# Altium PCB nRF52_UWB_MPU9255_Second_JLC.pcbdoc
Units mil, origin at the board's own origin, x right, y up, seen from the top; angles counter-clockwise.
Board outline 3070.43 x 2470.42 mil, 2 copper layers (Top Layer, Bottom Layer); 31 components, 29 nets, 182 pads, 66 vias.
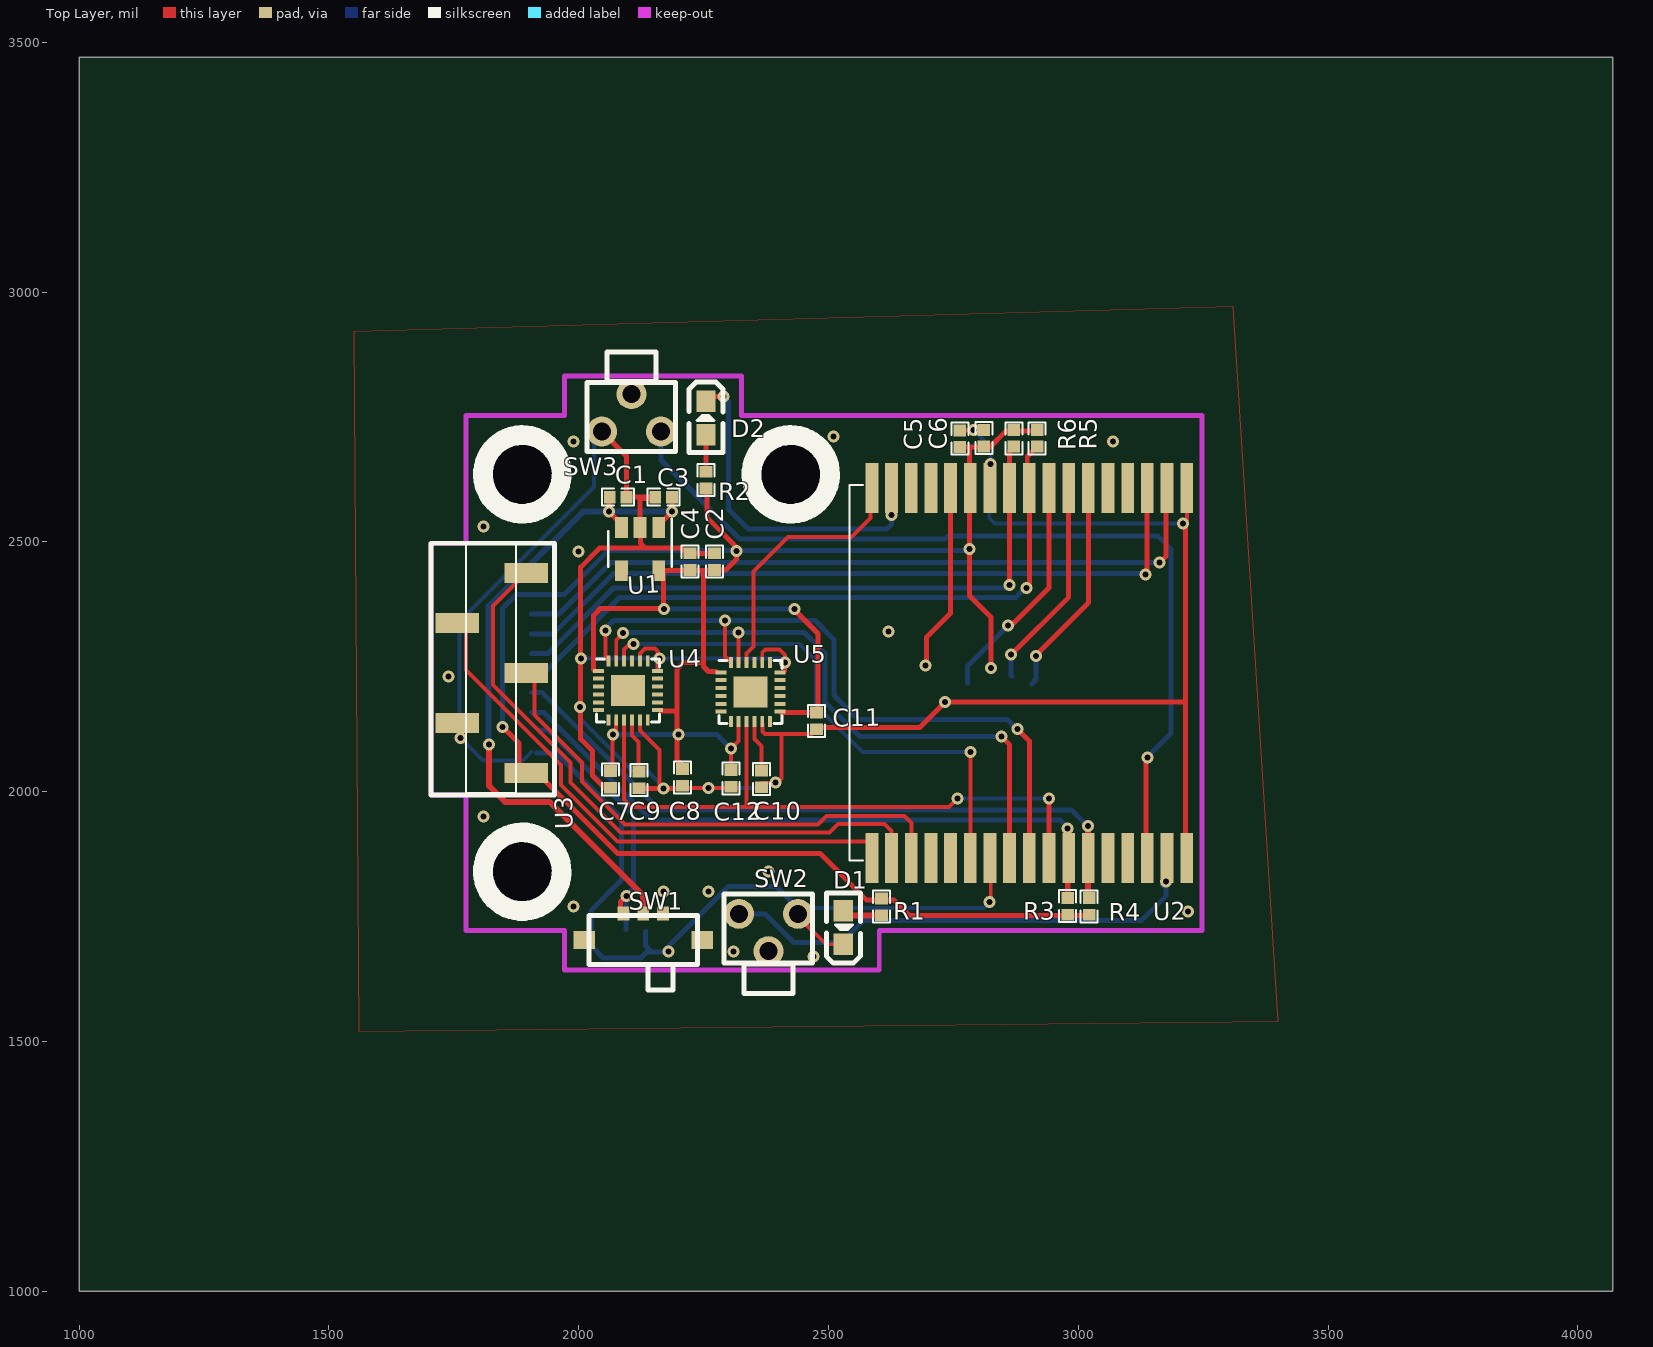
[diagram p0: Top Layer view]
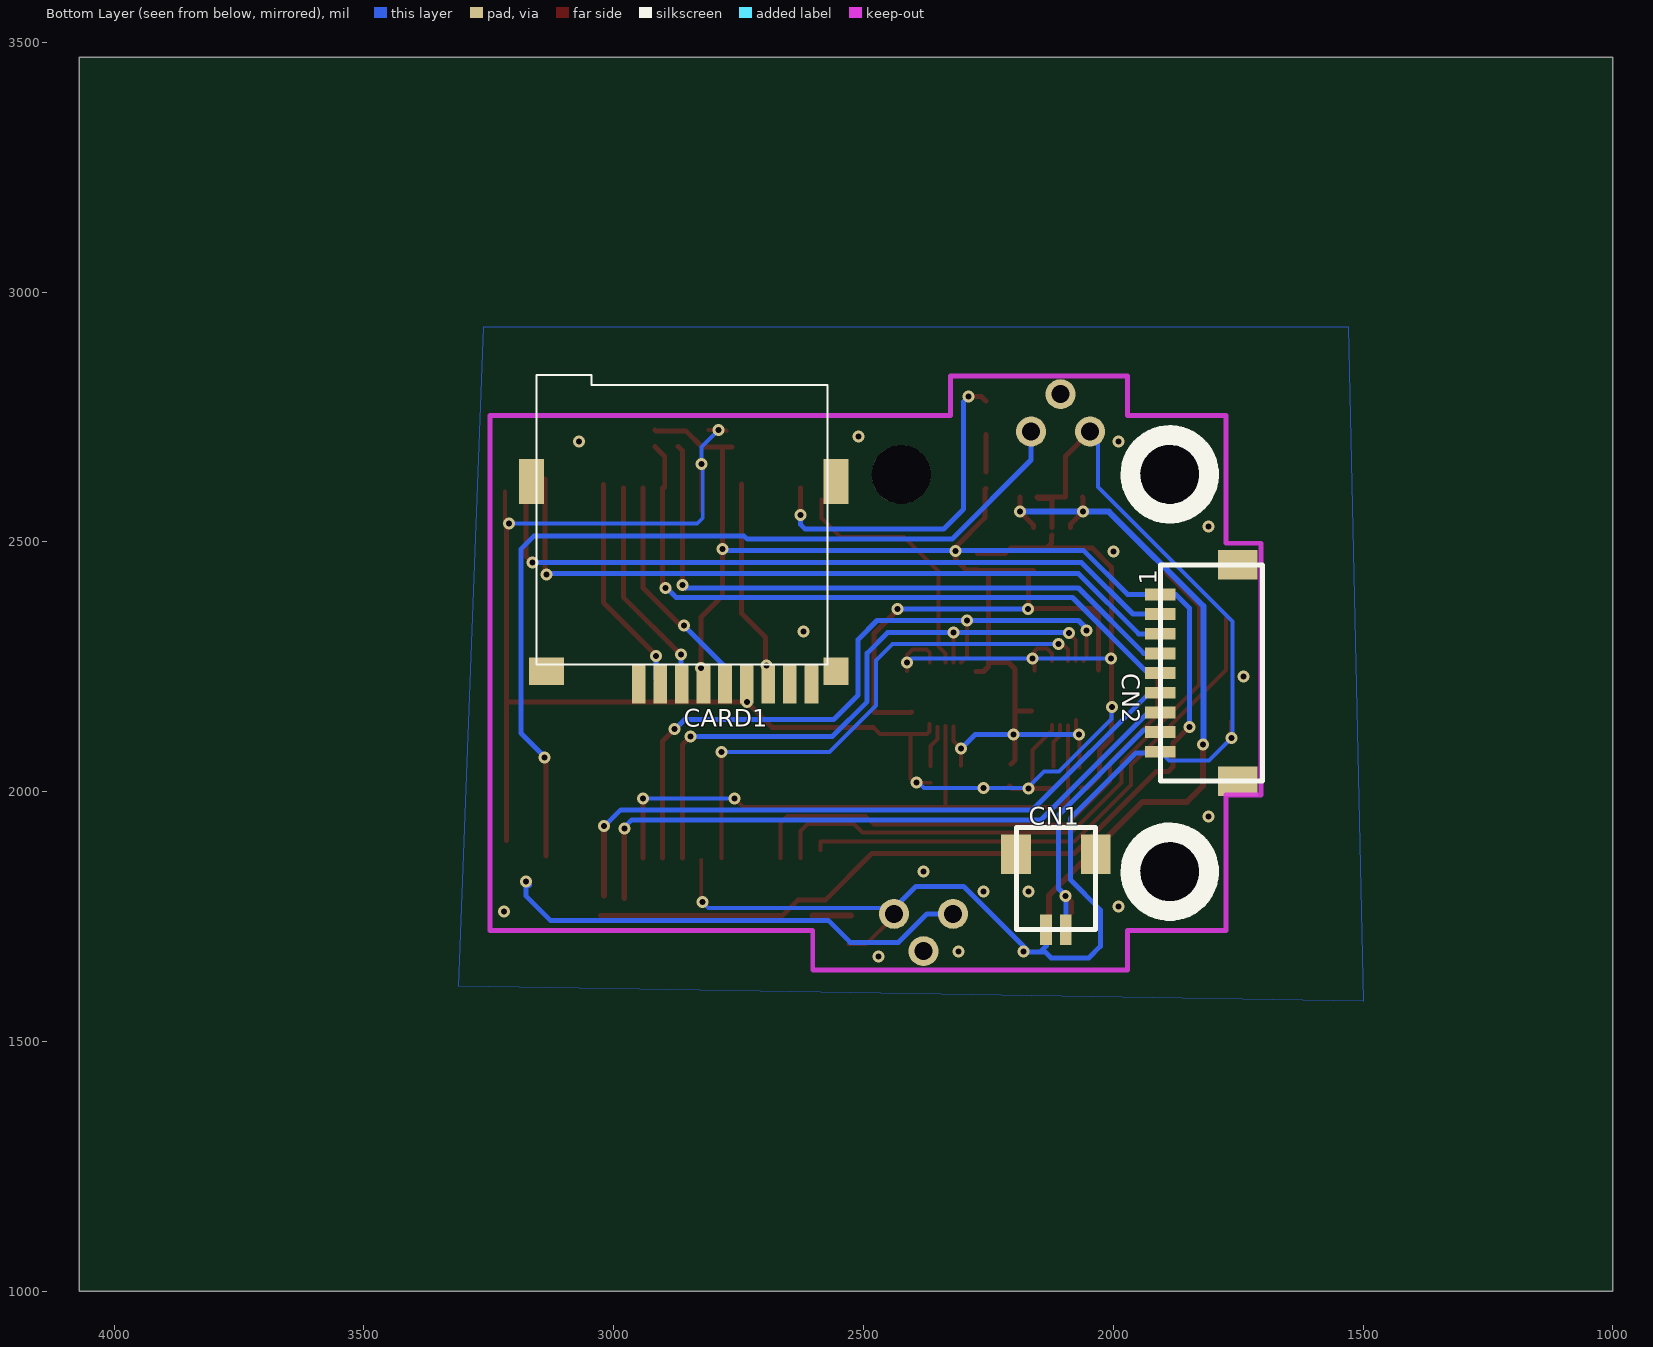
[diagram p1: Bottom Layer view, seen from below]

## Layer stack, top to bottom
Top Layer: signal copper (thickness not stored)
Dielectric: dielectric 12.6, FR-4, Dk 4.8
Bottom Layer: signal copper (thickness not stored)

## Board outline
4070.43,1000 1000,1000 1000,3470.42 4070.43,3470.42

## Components (designator, comment, footprint, x,y, rotation, side; value= is the part's Value field where it differs from the comment)
C1 "10uF" 0402 2079,2589.42 r180 top
C2 "10uF" 0402 2272,2460.42 r270 top
C3 "100nF" 0402 2170,2589.42 r0 top
C4 "100nF" 0402 2223,2460.42 r270 top
C5 "10uF" 0402 2763,2706.42 r270 top
C6 "100nF" 0402 2811,2707.42 r270 top
C7 "10nF" 0402 2064,2024.42 r90 top
C8 "100nF" 0402 2208,2028.42 r90 top
C9 "100nF" 0402 2121,2023.42 r270 top
C10 "100nF" 0402 2366,2025.42 r270 top
C11 "100nF" 0402 2476,2141.42 r90 top
C12 "10nF" 0402 2305,2026.42 r90 top
CARD1 "HYC77-TF09-200" TF-015 2860,2418.06 r180 bottom
CN1 "A1002WV-S-2P" A1002WR-S-2P_LEO 2114.93,1799.54 r180 bottom
CN2 "A1002WR-S-9P" A1002WR-S-9P_LEO 1830.09,2237.35 r270 bottom
D1 "YELLOW" LED-0603 2530,1728.06 r90 top
D2 "RED" LED-0603 2255,2748.06 r270 top
R1 "1K" 0402 2606,1769.42 r270 top
R2 "200" 0402 2255,2623.42 r270 top
R3 "10K" 0402 2979,1770.42 r270 top
R4 "10K" 0402 3021.96,1770.18 r270 top
R5 "10K" 0402 2918,2707.42 r90 top
R6 "10K" 0402 2871,2707.42 r90 top
SW1 "SSAJ120100" SW-SMD-5.5X2.5 2129.33,1729.44 r0 top
SW2 "KAN4562-0501C" KAN4562-0501C 2380,1718.01 r0 top
SW3 "KAN4562-0501C" KAN4562-0501C 2105.7,2758.01 r180 top
U1 "SPX3819M5-L-3-3/TR" SOT-23-5 2123,2485.42 r270 top
U2 "DWM1001" DWM1001 3054.53,2237.31 r270 top
U3 "GPS_Header" GPS_HEADER_SMT 1775,1721.56 r90 top
U4 "MPU-9250" QFN-24-1EP_3X3MM_PITCH0.4MM 2099,2202.42 r0 top
U5 "MPU-9250" QFN-24-1EP_3X3MM_PITCH0.4MM 2344,2199.42 r0 top

## Footprints (in the part's own frame and the unit in brackets; to place one, negate y for a bottom-side part, rotate by r counter-clockwise, add the part's x,y. Pads: shape width x height; smd on the part's side, far side on the other; paste and mask are expansions set on the pad)
0402 [mm]
  rect 0.6x0.65 smd: 1(-0.424,0) 2(0.424,0)
  silkscreen extent -0.82,-0.43 0.81,0.43
A1002WR-S-2P_LEO [mm]
  rect 0.6x1.55 smd: 1(-0.502,-1.925) 2(0.499,-1.925)
  rect 1.5x2 smd: 3(-2.033,1.904) 4(2.031,1.904)
  silkscreen extent -2,-1.92 2,3.27
A1002WR-S-9P_LEO [mm]
  rect 0.6x1.55 smd: 1(-4.001,-1.923) 2(-3,-1.923) 3(-1.997,-1.926) 4(-1.001,-1.923) 5(0,-1.923) 6(1.001,-1.923) 7(1.999,-1.923) 8(3.001,-1.923) 9(4,-1.923)
  rect 1.5x2 smd: 10(-5.499,2) 11(5.5,2)
  silkscreen extent -5.5,-1.92 5.5,3.28
DWM1001 [mm]
  rect 2.54x0.65 smd: 1(-9.404,4.129) 2(-9.404,3.129) 3(-9.404,2.128) 4(-9.404,1.13) 5(-9.404,0.129) 6(-9.404,-0.872) 7(-9.404,-1.87) 8(-9.404,-2.871) 9(-9.404,-3.872) 10(-9.404,-4.871) 11(-9.404,-5.871) 12(-9.404,-6.871) 13(-9.404,-7.872) 14(-9.404,-8.87) 15(-9.404,-9.871) 16(-9.404,-10.872) 17(-9.404,-11.87) 18(9.404,-11.87) 19(9.404,-10.872) 20(9.404,-9.871) 21(9.404,-8.87) 22(9.404,-7.872) 23(9.404,-6.871) 24(9.404,-5.871) 25(9.404,-4.871) 26(9.404,-3.872) 27(9.404,-2.871) 28(9.404,-1.87) 29(9.404,-0.872) 30(9.404,0.129) 31(9.404,1.13) 32(9.404,2.128) 33(9.404,3.129) 34(9.404,4.129)
  silkscreen extent -9.56,-13.02 9.54,-12.32
GPS_HEADER_SMT [mm]
  rect 1.02x2.2 smd: 1(8.02,-3.051) 2(10.56,0.45) 3(13.1,-3.051) 4(15.64,0.45) 5(18.18,-3.051)
  round 3 hole 3 slot 3 at 90 deg unplated: ""(3,-2.85) ""(23.2,-2.85)
  silkscreen extent 1,-4.85 25.2,1.8
KAN4562-0501C [mil]
  round 60 hole 36: 0(0,-37.4) 1(-59.05,37.4) 2(59.06,37.4)
  silkscreen extent -89,-122 89,77
LED-0603 [mil]
  rect 43x39 smd: 1(33.5,0) 2(-33.5,0)
  silkscreen extent -72,-34 70,34
QFN-24-1EP_3X3MM_PITCH0.4MM [mil]
  rect 21.65x7.87 smd: 1(-59.05,39.35) 2(-59.05,23.65) 3(-59.05,7.85) 4(-59.05,-7.85) 5(-59.05,-23.65) 6(-59.05,-39.35) 13(59.05,-39.35) 14(59.05,-23.65) 15(59.05,-7.85) 16(59.05,7.85) 17(59.05,23.65) 18(59.05,39.35)
  rect 7.87x21.65 smd: 7(-39.35,-59.05) 8(-23.65,-59.05) 9(-7.85,-59.05) 10(7.85,-59.05) 11(23.65,-59.05) 12(39.35,-59.05) 19(39.35,59.05) 20(23.65,59.05) 21(7.85,59.05) 22(-7.85,59.05) 23(-23.65,59.05) 24(-39.35,59.05)
  rect 34.45x31.5 smd: 25(-17.1,-15.75) 25(-17.1,15.75) 25(17.15,-15.75) 25(17.15,15.75)
  silkscreen extent -63,-63 63,63
SOT-23-5 [mm]
  rect 1.06x0.65 smd: 1(-1.1,0.95) 2(-1.1,0) 3(-1.1,-0.95) 4(1.1,-0.95) 5(1.1,0.95)
  silkscreen extent -1.55,-1.61 0.9,1.61
SW-SMD-5.5X2.5 [mm]
  rect 0.6x0.7 smd: 1(-0.999,0.675) 2(1,0.675) C(-0.001,0.675)
  rect 1.1x0.9 smd: 4(-2.999,-0.675) 5(3,-0.675)
  silkscreen extent -2.75,-3.22 2.75,0.58
TF-015 [mil]
  rect 27.56x78.74 smd: 1(-90.2,-202.55) 2(-46.95,-202.5) 3(-3.75,-202.55) 4(39.5,-202.55) 5(82.8,-202.55) 6(126,-202.55) 7(169.2,-202.55) 8(212.4,-202.55) 9(255.9,-202.55)
  rect 50x55 smd: 10(305,-177.4)
  rect 50x90 smd: 11(305,202.6) 12(-305,202.6)
  rect 70x55 smd: 13(-275,-177.4)
  silkscreen extent -295,-163 288,416

## Free pads (board coordinates)
  round 118.11 hole 118.1 slot 118.11 at 0 deg unplated: ""(2424.61,2634.95)

## Via types
v1: diameter 24.02, hole 12.01, Top Layer to Bottom Layer, 66 vias

## Nets (pads, with @x,y where several pads share a name; then routed paths per layer and width w, separated by ;. In a path a pad name is that pad's centre, name@x,y a point inside that pad or via, vN(x,y) a via of type N, cw(c..) or ccw(c..) an arc to the next point about the centre after c; other vN are vias at no path point)
BUTTON_RST: SW2.1 U2.33 | length 953.7
  Bottom Layer w10: SW2.1@2320.95,1755.46 2372.96,1755.46 2430,1698.42 2527,1698.42 2571,1742.42 3127,1742.42 3176,1791.42 v1@3176,1819.42
  Bottom Layer w11.81: v1@3170,1813.42 v1@3176,1819.42
  other v1: 3175.65,1820.42
BUTTON_SDCARD: SW3.1 U2.32 | length 1794.7
  Top Layer w10: U2.32@3136,1871.42 v1@3136,2074.42
  Bottom Layer w10: SW3.1@2164.76,2720.66 2164.76,2663.66 2323.2,2505.22 2732.8,2505.22 2739,2511.42 3160,2511.42 3186,2485.42 3186,2117.42 v1@3139,2070.42
  other v1: 3138.65,2068.42
CHARGE_VC: CN1.2 CN2.8 SW1.1 | length 530.6
  Top Layer w10: SW1.1@2084,1758.42 2084,1779.42 v1@2096,1791.42
  Bottom Layer w10: CN2.8@1923,2123.42 1939,2123.42 2110,1952.42 2110,1806.12 2095.3,1791.42 CN1.2
  other v1: 2095.65,1791.42
D2_1: D2.1 R2.1 | length 74.4
  Top Layer w10: R2.1 D2.1
FOOT_2: CN2.4 R6.1 U2.10 | length 1293.5
  Top Layer w10: v1@2862.75,2413.42 2862.75,2682.47 R6.1
  Bottom Layer w10: CN2.4 1939.34,2276.76 2070,2407.42 2856,2407.42 v1(2862,2413.42)
FOOT_5: CN2.5 R5.1 U2.9 | length 1349.4
  Top Layer w10: U2.9@2898,2608.42 2898,2670.72 R5.1 ; v1@2902.1,2407.42 U2.9
  Bottom Layer w10: CN2.5 1930.94,2237.36 2082,2388.42 2875,2388.42 v1@2894,2407.42
  other v1: 2897,2407.42
FOOT_6: CN2.6 R4.1 U2.29 | length 1365.8
  Top Layer w11.81: v1@3019,1932.42 3020,1931.42 R4.1@3020,1792.42
  Bottom Layer w10: CN2.6 1927.46,2197.96 2162,1963.42 2986,1963.42 v1@3020,1929.42
  other v1: 3019.65,1931.42
FOOT_7: CN2.7 R3.1 U2.28 | length 1310.7
  Top Layer w11.81: R3.1 v1@2979,1926.42
  Bottom Layer w10: CN2.7 1929.76,2158.66 2145,1943.42 2964,1943.42 v1@2981,1926.42
  other v1: 2978.65,1926.42
GND: C1.1 C2.1 C3.1 C4.1 C5.1 C6.1 C7.1 C8.1 C9.2 C10.2 C11.1 C12.1 CARD1.6 CN1.1 CN2.9 D1.2 SW2.2 SW3.2 U1.2 U2.1 U2.11 U2.24 U2.34 U3.2 U4.11 U4.18 U4.20 U5.11 U5.18 U5.20 | length 7541.8
  Top Layer w7.87: v1@1764,2107.42 1765,2108.42 U3.2@1765,2140.42 ; U4.20 2122.65,2276.07 2133,2286.42 2153,2286.42 2158,2281.42 U4.18@2158,2242.42 ; U4.11@2123,2133.42 2123,2122.42 2162,2083.42 v1@2162,2006.72 ; C8.1@2212,2007.42 C12.1@2315,2007.42 ; C10.2@2366,2017.72 2397.3,2017.72 2406,2026.42 2406,2115.42 ; U5.20 2367.65,2278.07 2374,2284.42 2402,2284.42 2413,2273.42 U5.18@2413,2241.42 ; U5.11@2367.9,2135.7 2367.9,2120.52 2373,2115.42 2467,2115.42 C11.1@2480,2128.42 ; SW2.2@2444,1745.42 2494.86,1694.56 D1.2 ; C5.1@2774,2721.42 2776.7,2724.12 C6.1 ; v1@2822,1777.42 2825,1780.42 U2.24@2825,1863.42 ; U2.11@2823,2657.42 2825,2655.42 U2.11@2825,2561.42 ; v1@3210,2535.42 3218,2543.42 U2.1@3218,2600.42
  Top Layer w10: SW3.2@2046.65,2720.66 2095.7,2671.61 C1.1 C3.1 2150.3,2586.42 2122,2586.42 2123,2585.42 U1.2 ; C7.1 2051.7,2007.72 2028,2031.42 2028,2081.42 2004,2105.42 2004,2449.42 2042,2487.42 2206,2487.42 2216.3,2477.12 C2.1 ; C9.2 2203,2006.72 C8.1 ; U1.2@2123,2513.42 2124,2512.42 2124,2497.42 2134,2487.42 ; C11.1@2480,2128.42 2683,2128.42 2734,2179.42 3215,2179.42 ; v1(3209.65,2536.42) 3215,2531.07 U2.34@3215,1902.42
  Bottom Layer w7.87: CN2.9 1888.36,2062.42 1809,2062.42 1762,2109.42 1762,2340.42 2031,2609.42 2031,2705.01 SW3.2@2046.65,2720.66 ; v1@2003,2169.42 2003.77,2168.65 2003.77,2145.42 2108.77,2040.42 2139,2040.42 2172,2007.42 2379,2007.42 v1@2391,2019.42 ; v1@2005,2266.42 2404.65,2266.42 v1(2412.65,2258.42) ; SW2.2@2439.06,1755.46 2451.02,1767.42 2811,1767.42 v1@2823,1779.42 ; v1(2790.65,2724.12) 2824.65,2690.12 v1(2824.65,2655.42) 2822,2652.77 2822,2547.42 2833,2536.42 v1(3209.65,2536.42)
  Bottom Layer w10: CN2.9@1916,2077.42 1955,2077.42 2086,1946.42 2086,1823.42 2026,1763.42 2026,1690.42 2049,1667.42 2125,1667.42 2137,1679.42 2169,1679.42 2300,1810.42 2395,1810.42 SW2.2@2440,1765.42 ; CN1.1@2134,1720.42 2134,1691.42 2146,1679.42 ; SW2.2@2431,1736.42 SW2.2@2438,1743.42
  other v1: 2470,1670.42 2180,1680.42 2310,1680.42 3220,1760.42 1990,1770.42 2822.65,1779.42 2170,1800.42 2260,1800.42 2380,1840.42 1810,1950.42 2170,2006.72 2260,2007.42 2394.09,2018.51 1763.65,2107.42 2002.65,2169.42 2733.65,2179.42 1740,2230.42 2004.65,2266.42 2161.73,2266.24 2620,2320.42 2000,2480.42 1810,2530.42 1990,2700.42 3070,2700.42 2510,2710.42
GPS_1PPS: U2.19 U3.5 | length 1261.3
  Top Layer w7.87: U3.5 1829,2371.21 1829,2213.42 1984,2058.42 1984,2018.42 2084,1918.42 2502,1918.42 2519,1935.42 2612,1935.42 2626.5,1920.92 U2.19
GPS_UART_RX: U2.18 U3.4 | length 1097.5
  Top Layer w7.87: U3.4@1775,2347.42 1775,2243.42 1965,2053.42 1965,2013.42 2078,1900.42 2586,1900.42 U2.18@2586,1883.42
GPS_UART_TX: U2.20 U3.3 | length 1042.1
  Top Layer w7.87: U3.3@1912,2245.42 1912,2153.42 2007,2058.42 2007,2020.42 2093,1934.42 2479,1934.42 2496,1951.42 2652,1951.42 2665.9,1937.52 U2.20
LED_R: D2.2 U2.16 | length 687.6
  Top Layer w10: D2.2 2263.86,2790.42 v1(2290,2790.42) ; v1(2626,2553.42) 2626,2607.06 U2.16
  Bottom Layer w10: v1(2290,2790.42) 2300,2780.42 2300,2777.42 2300,2565.42 2340.12,2525.3 2616.88,2525.3 2626,2534.42 v1(2626,2553.42)
MPU92_CLK: U2.25 U4.23 U5.23 | length 1269.6
  Top Layer w7.87: U4.23 2075.35,2303.77 v1(2089,2317.42) ; U5.23 v1@2320.35,2318.42
  Top Layer w10: v1(2846,2110.42) 2862.75,2093.67 U2.25
  Bottom Layer w10: v1@2091,2318.42 2451.75,2318.42 2493,2277.17 2493,2179.96 2561.77,2111.19 ; 2561.77,2110.42 v1(2846,2110.42)
  other v1: 2320,2318.42
MPU92_MISO: U2.27 U4.9 U5.9 | length 1293.1
  Top Layer w7.87: 2091,2132.42 2091,1984.42 2106,1969.42 2741,1969.42 v1(2758,1986.42) ; 2336,1969.42 U5.9@2336,2131.42
  Top Layer w10: U2.27 v1(2941.5,1986.42)
  Bottom Layer w7.87: v1(2758,1986.42) v1(2941.5,1986.42)
MPU92_MOSI: U2.26 U4.24 U5.24 | length 1416.8
  Top Layer w7.87: v1(2054,2322.42) 2054,2267.12 U4.24 ; v1@2293,2350.42 2293,2270.07 U5.24 U5.24
  Top Layer w10: v1(2878,2125.42) 2902.1,2101.32 U2.26
  Bottom Layer w10: v1@2052,2324.42 2070,2342.42 2473,2342.42 2511,2304.42 2511,2193.42 2560,2144.42 2858,2144.42 2877,2125.42 v1(2878,2125.42)
  other v1: 2293,2342.42
MPU92_NCS: U2.23 U4.22 | length 1076.8
  Top Layer w7.87: U4.22 2091.15,2284.11 2102.46,2295.42 v1(2110,2295.42) ; U2.23 v1(2784,2079.42)
  Bottom Layer w7.87: v1@2108,2295.42 2442.22,2295.42 2475,2262.64 2475,2172.51 2568.09,2079.42 v1(2784,2079.42)
MPU92B_NCS: U2.17 U5.22 | length 503
  Top Layer w7.87: U5.22 2336.15,2276.35 2350,2290.2 2350,2440.42 2419,2509.42 2546,2509.42 2584,2547.42 U2.17@2584,2584.42
R1_2: D1.1 R1.2 | length 77
  Top Layer w11.81: D1.1@2525,1752.42 R1.2@2602,1752.42
SDCARD_CLK: CARD1.5 U2.8 | length 459.6
  Top Layer w10: v1@2863,2329.42 2941.5,2407.92 U2.8
  Bottom Layer w10: CARD1.5@2778,2217.42 2778,2250.42 v1@2860,2332.42
  other v1: 2859.65,2332.42
SDCARD_MISO: CARD1.7 U2.13 | length 383.1
  Top Layer w10: v1@2693,2253.42 2696,2256.42 2696,2308.42 2744,2356.42 U2.13@2744,2615.42
  other v1: 2694.65,2252.42
SDCARD_MOSI: CARD1.3 U2.7 | length 424.3
  Top Layer w10: v1@2866,2274.42 2980.9,2389.32 U2.7
  Bottom Layer w10: v1(2865.65,2274.42) 2865.65,2232.77 CARD1.3@2867,2231.42
SDCARD_NCS: CARD1.2 U2.6 | length 446.8
  Top Layer w10: v1@2914,2271.42 3021,2378.42 U2.6@3021,2614.42
  Bottom Layer w10: CARD1.2 2915.65,2224.26 v1(2915.65,2271.42)
SWD_CLK: CN2.2 U2.2 | length 1469.2
  Top Layer w10: v1(3163,2458.42) 3176,2471.42 U2.2@3176,2622.42
  Bottom Layer w10: CN2.2 1960.76,2355.46 2063.72,2458.42 v1(3163,2458.42)
SWD_DIO: CN2.3 U2.3 | length 1470
  Top Layer w10: v1@3138,2434.42 U2.3@3138,2625.42
  Bottom Layer w10: CN2.3 1949.54,2315.96 2070,2436.42 v1@3135,2436.42
  other v1: 3135,2434.42
U4_10: C9.1 U4.10 | length 88.7
  Top Layer w7.87: U4.10@2106.9,2133.7 2106.9,2112.52 2120,2099.42 C9.1@2120,2050.42
U5_10: C10.1 U5.10 | length 84.4
  Top Layer w7.87: U5.10@2351.9,2129.7 2351.9,2105.22 2366,2091.12 C10.1@2366,2051.12
VCC3.3: C2.2 C4.2 C5.2 C6.2 C7.2 C8.2 C11.2 C12.2 CARD1.4 CN2.1 R1.1 R2.2 R3.2 R4.2 R5.2 R6.2 U1.5 U2.12 U3.1 U4.1 U4.8 U4.13 U5.1 U5.8 U5.13 | length 5393.1
  Top Layer w7.87: C7.2@2068,2048.42 2068,2106.42 2075,2113.42 U4.8@2075,2143.37 ; C12.2@2305,2052.12 v1(2305,2086.12) 2319.9,2101.02 U5.8@2319.9,2130.7
  Top Layer w10: v1@1848,2129.42 1881,2096.42 1881,2049.42 1890,2040.42 1914,2040.42 2078,1876.42 2483,1876.42 2576,1783.42 2631,1783.42 2662,1752.42 R4.2@3027,1752.42 ; U4.1@2030,2243.42 2030,2352.42 2044,2366.42 2170,2366.42 U1.5@2170,2442.12 ; U1.5 2270.4,2442.12 C2.2 2294.3,2443.72 2316,2465.42 2316,2489.42 2257.3,2548.12 2257.3,2604.42 R2.2 ; U4.13@2164,2161.42 2195.3,2161.42 2197,2163.12 ; C8.2@2205,2055.12 2197,2063.12 2197,2245.42 2210,2258.42 2250,2258.42 ; 2250,2441.12 2250,2250.42 2260,2240.42 U5.1@2275,2240.42 ; U5.13@2404.16,2158.96 2405,2158.12 2479,2158.12 2479,2316.42 v1@2431,2364.42 ; v1@2826,2247.42 2825,2248.42 2825,2349.42 2782,2392.42 2782,2687.42 2784,2689.42 2763.3,2689.42 C5.2 2823.3,2689.72 2855,2721.42 2915.3,2721.42 R5.2
  Bottom Layer w10: v1@1848,2129.42 1848,2367.42 1875,2394.42 1971.43,2394.42 2059.43,2482.42 v1@2783,2482.42 ; v1(2068.65,2114.42) 2276.7,2114.42 v1(2305,2086.12) ; v1(2171,2365.42) v1@2429.46,2365.42
  other v1: 2200,2114.42 1847.65,2129.42 2825.65,2247.42 2432,2365.42 2316,2481.42 2782,2485.42
VCC3.7: C1.2 C3.2 SW1.C U1.1 U1.3 | length 1509.8
  Top Layer w10: C1.2 2061,2588.12 v1(2061,2560.42) 2085.6,2535.82 U1.3 ; U1.1 2160.4,2533.82 v1(2187,2560.42) 2187,2589.12 C3.2
  Top Layer w11.81: v1(1821,2094.42) 1821,2011.42 1853,1979.42 1942,1979.42 2129.29,1792.13 SW1.C
  Bottom Layer w10: v1(2061,2560.42) v1(2187,2560.42)
  Bottom Layer w11.81: v1@1820,2094.42 1820,2371.42 2009,2560.42 v1(2187,2560.42)
pads on no net: CARD1.1 CARD1.8 CARD1.9 CARD1.10 CARD1.11 CARD1.12 CARD1.13 CN1.3 CN1.4 CN2.10 CN2.11 SW1.2 SW1.4 SW1.5 SW2.0 SW3.0 U1.4 U2.4 U2.5 U2.14 U2.15 U2.21 U2.22 U2.30 U2.31 U3. U4.2 U4.3 U4.4 U4.5 U4.6 U4.7 U4.12 U4.14 U4.15 U4.16 U4.17 U4.19 U4.21 U4.25 U5.2 U5.3 U5.4 U5.5 U5.6 U5.7 U5.12 U5.14 U5.15 U5.16 U5.17 U5.19 U5.21 U5.25

## Polygon pours and split planes (outlines as drawn)
GND on Bottom Layer (solid): 1530,2930.42 1500,1580.42 3310,1610.42 3260,2930.42
GND on Top Layer (solid): 1550,2920.42 1560,1520.42 3400,1540.42 3310,2970.42

## Silkscreen, mask and mechanical layers (free items; w line width, h text height)
Top Overlay:
  lines w39.37: 2503.27,2631.46 cw(c2424.61,2635.01) 2503.35,2634.95

## Text inside footprints (layer, text, board x,y; h text height)
CN2: Bottom Overlay "1" at 1913.29,2414.52 h35.43 r270
U3: Document "37.4" at 2625.61,1535.43 h35.43 r180; Document "26.2" at 1631.35,2532.1 h35.43 r90